# Altium PCB subsystem_intro_prj.PcbDoc
Units mil, origin at the board's own origin, x right, y up, seen from the top; angles counter-clockwise.
Board outline 1750 x 1000 mil, 2 copper layers (Top Layer, Bottom Layer); 6 components, 6 nets, 21 pads, 1 vias.
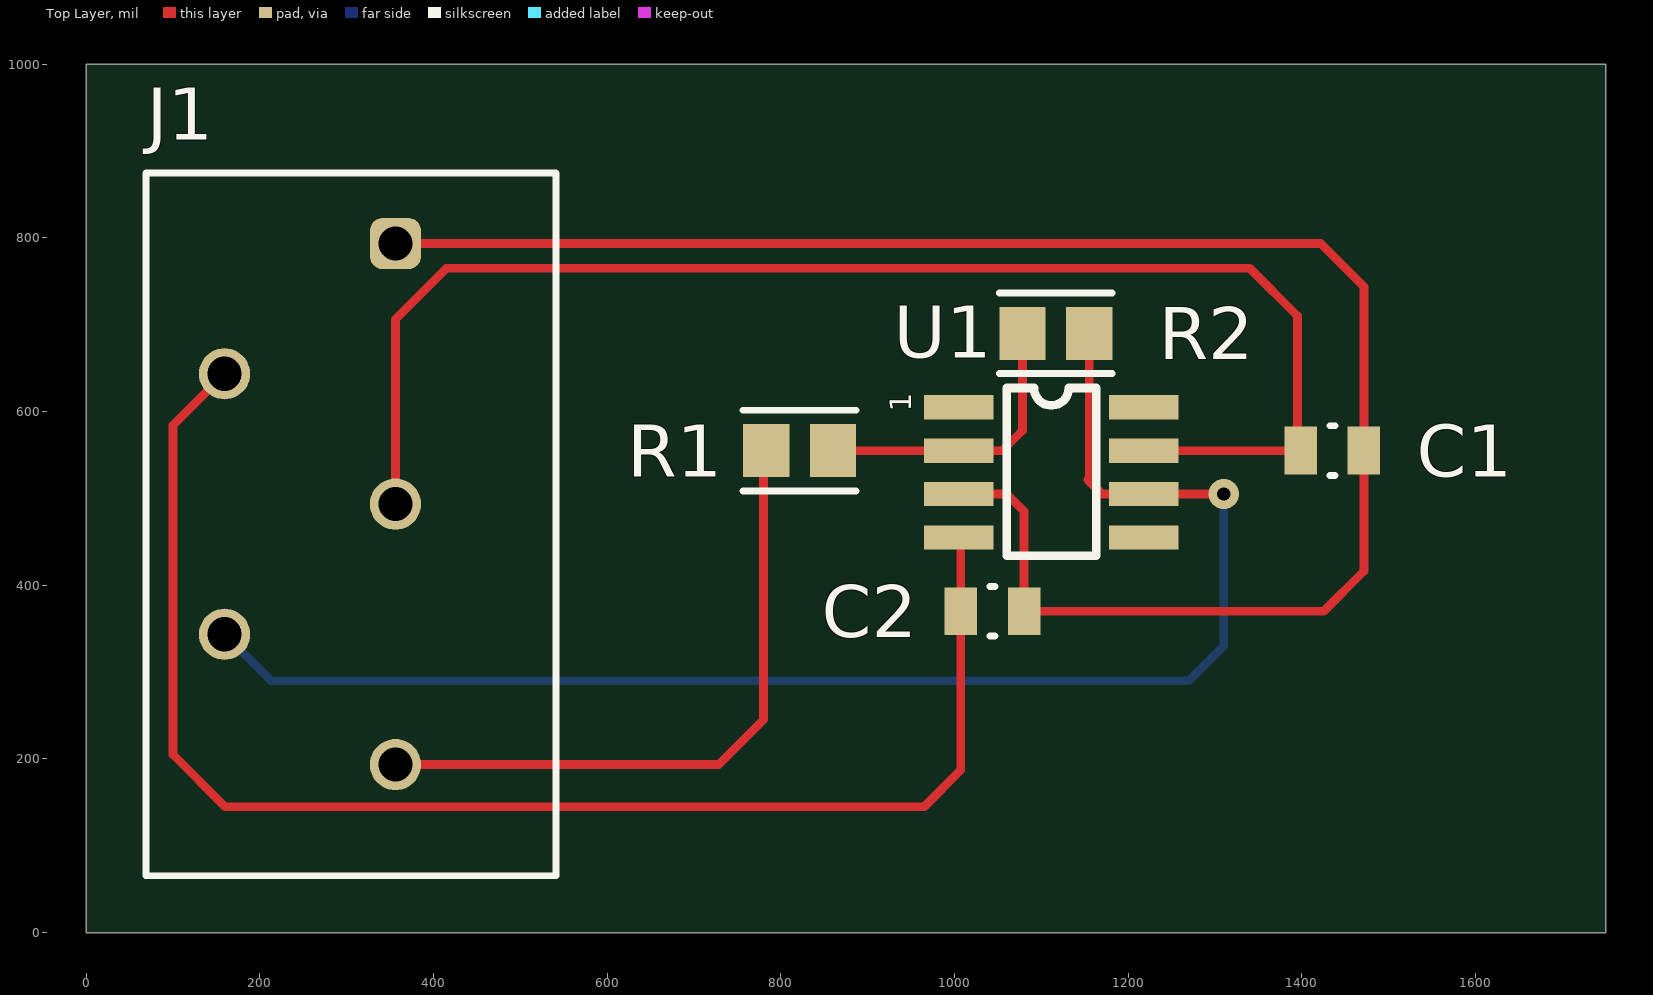
[diagram p0: Top Layer view]
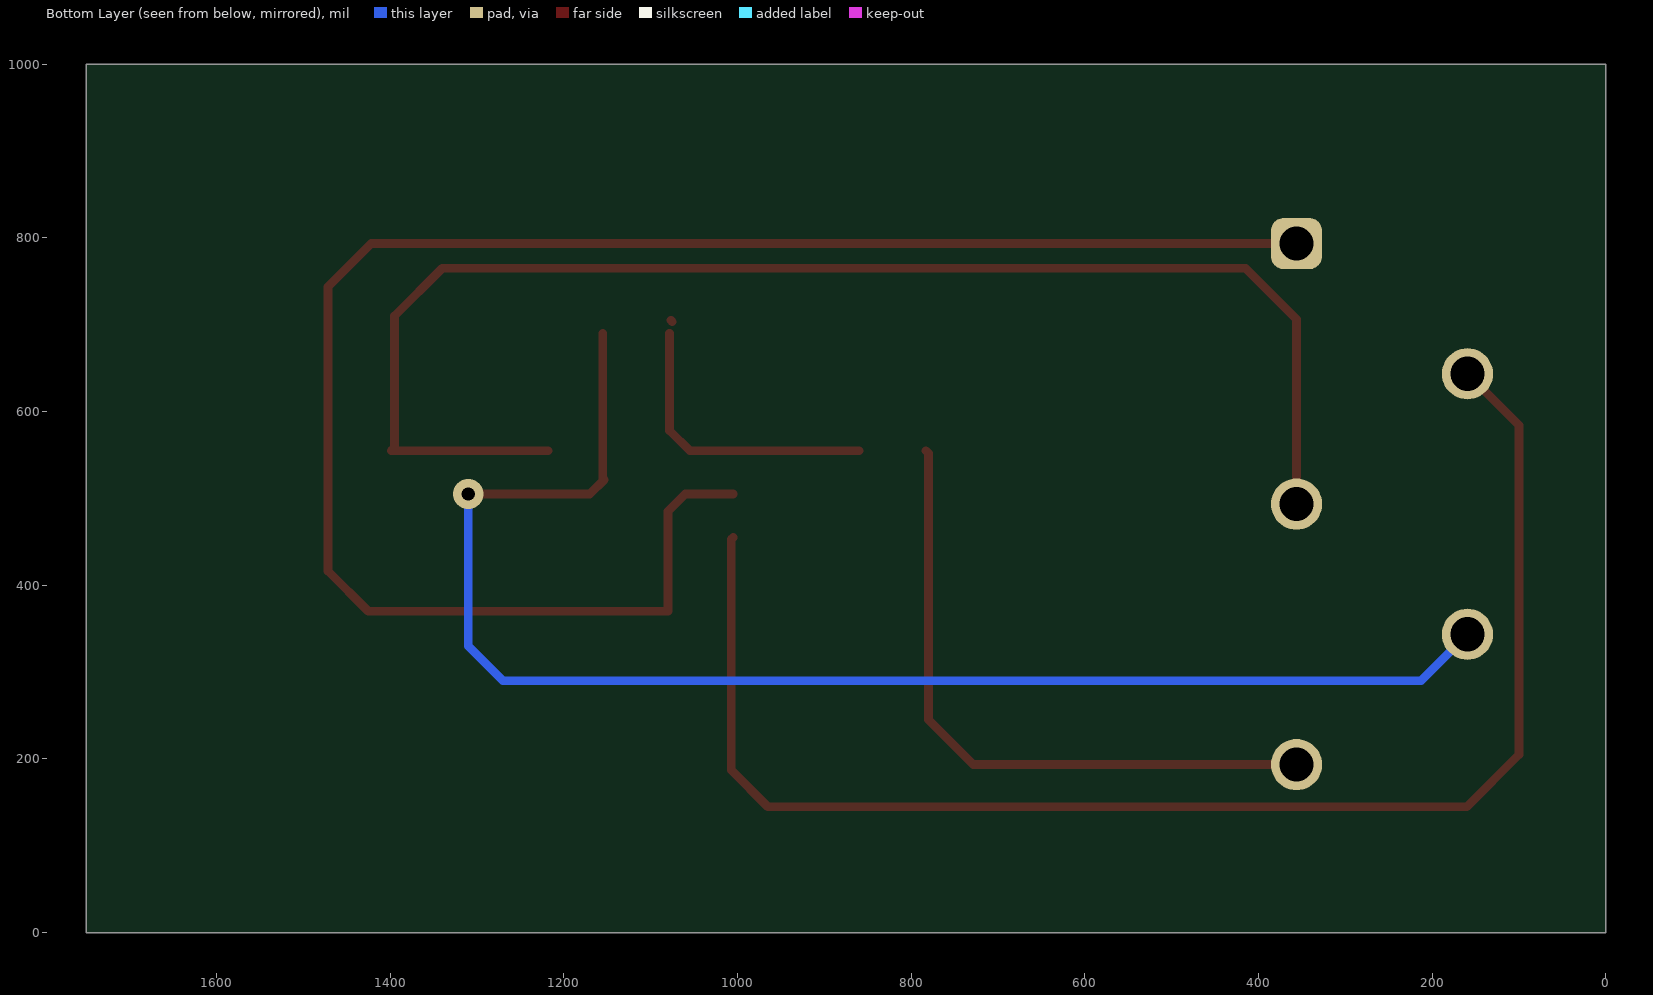
[diagram p1: Bottom Layer view, seen from below]
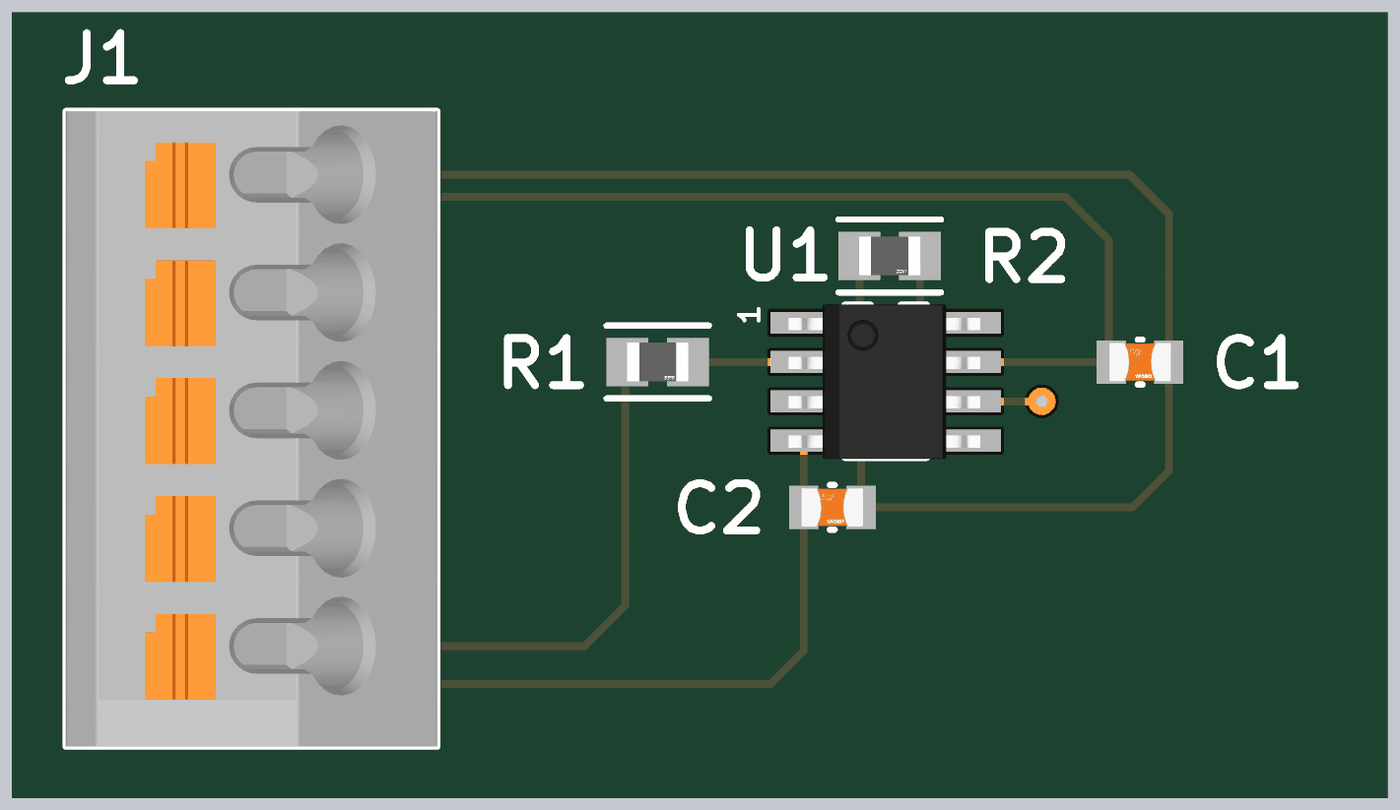
[diagram p2: 3D render of the assembled board from above, using the file's embedded part models]

## Layer stack, top to bottom
Top Solder: solder mask 0.4, Solder Resist, Dk 3.5
Top Layer: signal copper 1.4
Dielectric 1: dielectric 12.6, FR-4, Dk 4.8
Bottom Layer: signal copper 1.4
Bottom Solder: solder mask 0.4, Solder Resist, Dk 3.5

## Board outline
0,0 1750,0 1750,1000 0,1000

## Design rules (kind name [scope] priority, off if disabled: settings)
Clearance [All] p1: gap=5 ignorepadtopadclearanceinfootprint=FALSE
MinimumSolderMaskSliver [All] p1: minsoldermaskwidth=5
PolygonConnect [All] p1: connectstyle=Relief reliefconductorwidth=10 reliefentries=4 polygonreliefangle="90 Angle" airgapwidth=10
RoutingVias [All] p1: holewidth=28 width=50 viastyle="Through Hole" minholewidth=28 minwidth=50 maxholewidth=28 maxwidth=50
SilkToSilkClearance [All] p1: silktosilkclearance=5
SolderMaskExpansion [All] p1: expansion=4 istentingtop=FALSE
SupplyNets "Schematic Supply Nets" [InNet('12V0')] p1: voltage=0.000
SupplyNets "Schematic Supply Nets_1" [InNet('-12V0')] p2: voltage=0.000
SupplyNets "Schematic Supply Nets_2" [InNet('GND')] p3: voltage=0.000
Width [All] p1: maxlimit=1000 minlimit=5 preferedwidth=10
28 further rules are at their usual default settings.

## Classes and differential pairs
component class subsystem_intro_prj: C1 C2 R1 R2 U1

## Components (designator, comment, footprint, x,y, rotation, side; value= is the part's Value field where it differs from the comment)
C1 "CC0805KRX7R9BB104" FP-CC0805-0_85-MFG 1435,555 r0 top value="100 nF"
C2 "CC0805KRX7R9BB104" FP-CC0805-0_85-MFG 1043.58,370 r0 top value="100 nF"
J1 "691412320005" 691412320005 305,470 r90 top
R1 "RR1220P-103-D" FP-RR1220-IPC_A 821.59,555 r0 top
R2 "RR1220P-103-D" FP-RR1220-IPC_A 1116.59,690 r0 top
U1 "TL061ACD" TL061ACD 1005,605 r0 top

## Footprints (in the part's own frame and the unit in brackets; to place one, negate y for a bottom-side part, rotate by r counter-clockwise, add the part's x,y. Pads: shape width x height; smd on the part's side, far side on the other; paste and mask are expansions set on the pad)
691412320005 [mm] "3.81mm 45¡ã Cable Entry Screwless, 5p"
  rrect50% 1.5x1.5 hole 1: 1(8.215,-1.3)
  round 1.5 hole 1: 2(4.405,3.7) 3(0.595,-1.3) 4(-3.215,3.7) 5(-7.025,-1.3)
  silkscreen extent -10.28,-6 10.28,6, body extent -10.28,-6 10.28,6, height 13.28
FP-CC0805-0_85-MFG [mm]
  rect 0.95x1.4 smd paste+0 mask+0: 1(-0.925,0) 2(0.925,0)
  silkscreen extent -0.08,-0.72 0.08,0.72, body extent -1.6,-1.05 1.6,1.05, height 0.25
FP-RR1220-IPC_A [mil]
  rect 53.34x61.27 smd paste+0 mask+0: 1(-38.41,0) 2(38.41,0)
  silkscreen extent -65,-46 65,46, body extent -85,-50 85,50, height 10
TL061ACD [mil]
  rect 80x28 smd: 1(0,0) 2(0,-50) 3(0,-100) 4(0,-150) 5(213,-150) 6(213,-100) 7(213,-50) 8(213,0)
  silkscreen extent 55,-171 158,22, body extent -17,-173 227,23, height 70

## Part data
C1 C2: library part CMP-2100-03606-3, "CAP CER 0.1UF 50V X7R 0805", Capacitance="100 nF", Manufacturer=Yageo, Package=CC0805-0.85, Temperature="-30°C to +85°C", Temperature Characteristic=X7R, Temperature Range High=+85°C, Temperature Range Low=-30°C, Tolerance=0.1, Voltage Rating="50 V", Automotive=No, Category=Cap, ComponentLink2Description=Datasheet, ComponentLink2URL=http://www.yageo.com/documents/recent/UPY-GPHC_Y5V_6.3V-to-50V_8.pdf, Device Class L1="Passive Components", Device Class L2=Capacitors, Device Class L3="Ceramic Capacitors", Digikey Description="CAP CER 0.1UF 50V X7R 0805", Footprint Url=http://www.yageo.com/exep/pages/download/literatures/UPY-C_GEN_24.pdf, Height=0.95mm, Ipc Land Pattern Name=CAPC200125X85, Lead Free=Yes, Manufacturer Part Number=CC0805KRX7R9BB104, Material=Ceramic, Mouser Description="Multilayer Ceramic Capacitors MLCC - SMD/SMT 100nF 50V X7R 10%", Octopart=https://octopart.com/cc0805krx7r9bb104-yageo-192993, RoHS=TRUE
J1: library part CMP-1502-02954-2, Lead Pitch=3.81mm, NexarPartId=78871498, Number of Pins=5, Packaging=Box, RoHS=Non-Compliant
R1 R2: library part CMP-2001-03215-2, "10kΩ ±0.5% 0.1W 1/10W Chip Resistor 0805 (2012 Metric) Thin Film", Case Code (Imperial)=0805, Case Code (Metric)=2012, Max Operating Temperature=125°C, Max Power Dissipation=100mW, Min Operating Temperature=-55°C, Package Quantity=1, Resistance=10k, Resistance Tolerance=0.5%, Resistor Type="Thin Film", Temperature Coefficient=25ppm/°C, Voltage Rating=100V, Case/Package=0805, Depth=1.25mm, Height=0.4mm, Lead Free="Lead Free", Length=2mm, Number of Terminations=2, Packaging="Tape and Reel", Power Rating=100mW, RoHS Compliant=Yes, Series=RR, Size Code=0805, Technology="THIN FILM", Termination=SMD/SMT, Tolerance=0.5%, Voltage Rating (DC)=100V, Weight=0.000194oz, Width=1.25mm

## Via types
v1: diameter 35, hole 15, Top Layer to Bottom Layer, 1 vias

## Nets (pads, with @x,y where several pads share a name; then routed paths per layer and width w, separated by ;. In a path a pad name is that pad's centre, name@x,y a point inside that pad or via, vN(x,y) a via of type N, cw(c..) or ccw(c..) an arc to the next point about the centre after c; other vN are vias at no path point)
12V0: C1.1 J1.3 U1.7 | length 1635.8
  Top Layer w10: J1.3 356.18,706.18 415,765 1340,765 1395,710 1395,558.58 C1.1 U1.7
-12V0: C2.1 J1.2 U1.4 | length 1681.2
  Top Layer w10: J1.2 100,584.09 100,205 160,145 965,145 1007.17,187.17 C2.1 1007.17,452.83 U1.4
GND: C1.2 C2.2 J1.1 U1.3 | length 2072
  Top Layer w10: J1.1 1421.57,793.43 1471.42,743.58 C1.2 1471.42,416.42 1425,370 C2.2 1080,485 1060,505 U1.3
IN: J1.5 R1.1 | length 756.5
  Top Layer w10: J1.5 728.43,193.43 780,245 780,551.82 R1.1
NetR1_2: R1.2 R2.1 U1.2 | length 341.8
  Top Layer w10: R1.2 U1.2 1055,555 1078.18,578.18 R2.1 ; R2.1@1075,703.41 R2.1@1076.59,705
OUT: J1.4 R2.2 U1.6 | length 1696.9
  Top Layer w10: R2.2 1155,523.18 1153.41,521.59 1170,505 U1.6 v1(1310,505)
  Bottom Layer w10: J1.4 212.76,290 1270,290 1310,330 v1(1310,505)
pads on no net: U1.1 U1.5 U1.8

## Silkscreen, mask and mechanical layers (free items; w line width, h text height)
Mechanical 1:
  the board outline again, w10

## Text inside footprints (layer, text, board x,y; h text height)
U1: Top Overlay "1" at 950,600 h25 r90